# Altium PCB PCB.PcbDoc
Units mm, origin at the board's own origin, x right, y up, seen from the top; angles counter-clockwise.
Board outline 44.8 x 15 mm, 2 copper layers (Top Layer, Bottom Layer), stack 1.18 mm thick; 4 components, 14 nets, 48 pads, 18 vias.
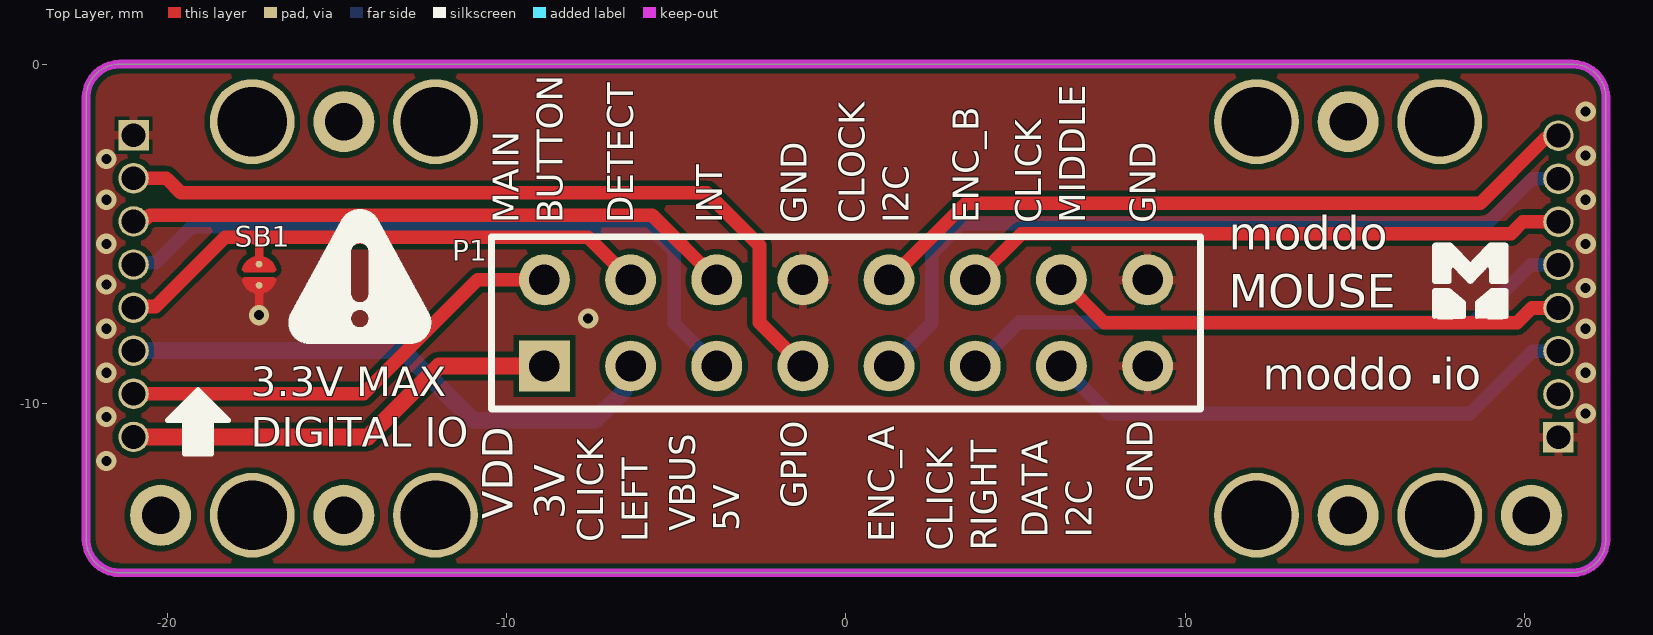
[diagram p0: Top Layer view]
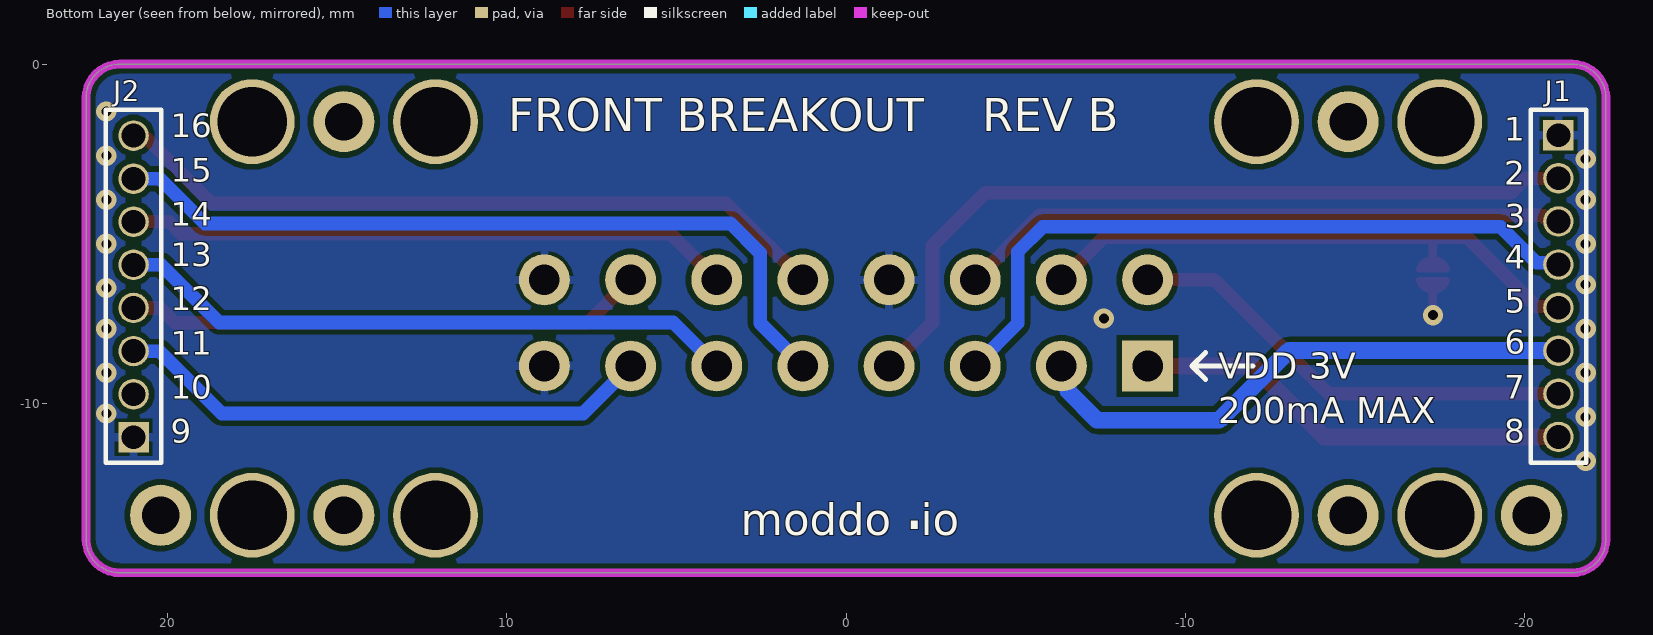
[diagram p1: Bottom Layer view, seen from below]

## Layer stack, top to bottom
Top Solder: solder mask 0.0102, Solder Resist, Dk 3.5
Top Layer: signal copper 0.0356
Dielectric 1: dielectric 1.1086, FR-4, Dk 4.8
Bottom Layer: signal copper 0.0356
Bottom Solder: solder mask 0.0102, Solder Resist, Dk 3.5

## Board outline
-21.4,-15 cw(c-21.4,-14) -22.4,-14 -22.4,-1 cw(c-21.4,-1) -21.4,0 21.4,0 cw(c21.4,-1) 22.4,-1 22.4,-14 cw(c21.4,-14) 21.4,-15

## Design rules (kind name [scope] priority, off if disabled: settings)
BoardOutlineClearance [All] p1: gap=0.2 ignorepadtopadclearanceinfootprint=FALSE
Clearance GND_bot [InNamedPolygon('GND_bot')] p1: gap=0.2 ignorepadtopadclearanceinfootprint=FALSE
Clearance GND_top [InNamedPolygon('GND_top')] p2: gap=0.1 ignorepadtopadclearanceinfootprint=FALSE
Clearance [All] p3: gap=0.16 ignorepadtopadclearanceinfootprint=FALSE
HoleSize [All] p1: absolutevalues=TRUE maxlimit=20 minlimit=0.025 maxpercent=80.000 minpercent=20.000
MinimumSolderMaskSliver [All] p1: minsoldermaskwidth=0.05
PolygonConnect [All] p1: thpad.connectstyle=Relief thpad.reliefconductorwidth=0.254 thpad.reliefentries=4 thpad.polygonreliefangle="90 Angle" thpad.airgapwidth=0.1 smdpad.connectstyle=Relief smdpad.reliefconductorwidth=0.254 smdpad.reliefentries=4 smdpad.polygonreliefangle="90 Angle" smdpad.airgapwidth=0.1 via.connectstyle=Direct via.reliefconductorwidth=0.254 via.reliefentries=4 via.polygonreliefangle="90 Angle" via.airgapwidth=0.254
RoutingVias [All] p1: holewidth=0.3 width=0.4 viastyle="Through Hole" minholewidth=0.3 minwidth=0.4 maxholewidth=2 maxwidth=10
SilkToSilkClearance [All] p1: silktosilkclearance=0.01
SilkToSolderMaskClearance [IsPad] p1: minsilkscreentomaskgap=0.001 clearancetoexposedcopper=TRUE
SolderMaskExpansion [All] p1: expansion=0.05 istentingtop=FALSE
SupplyNets "Schematic Supply Nets_1" [InNet('GND')] p1: voltage=0.000
SupplyNets "Schematic Supply Nets" [InNet('VDD_EXP')] p2: voltage=0.000
SupplyNets "Schematic Supply Nets_2" [InNet('VBUS')] p3: voltage=0.000
UnRoutedNet [All] p1: checkbadconnections=TRUE
Width [All] p1: maxlimit=2.54 minlimit=0.089 preferedwidth=0.254
25 further rules are at their usual default settings.

## Components (designator, comment, footprint, x,y, rotation, side; value= is the part's Value field where it differs from the comment)
J1 "1.27mm_8pins" 1.27mm_8pins_MaleHeader -21,-2.1 r270 bottom
J2 "1.27mm_8pins" 1.27mm_8pins_MaleHeader 21,-11 r90 bottom
P1 "Header 8X2" HEADER_2_54_F_2X8 -8.89,-8.9 r0 top
SB1 "Solderbridge" Solderbridge -17.3,-6.212 r90 top

## Footprints (in the part's own frame and the unit in brackets; to place one, negate y for a bottom-side part, rotate by r counter-clockwise, add the part's x,y. Pads: shape width x height; smd on the part's side, far side on the other; paste and mask are expansions set on the pad)
1.27mm_8pins_MaleHeader [mm]
  rect 0.9x0.9 hole 0.7 mask+0.05: 1(0,0)
  round 0.9 hole 0.7 mask+0.05: 2(1.27,0) 3(2.54,0) 4(3.81,0) 5(5.08,0) 6(6.35,0) 7(7.62,0) 8(8.89,0)
  silkscreen extent -0.75,-0.82 9.65,0.82, body extent -0.83,-0.9 9.73,0.9, height 4.55
HEADER_2_54_F_2X8 [mm]
  rect 1.5x1.5 hole 0.9: 1(0,0)
  round 1.5 hole 0.9: 2(0,2.54) 3(2.54,0) 4(2.54,2.54) 5(5.08,0) 6(5.08,2.54) 7(7.62,0) 8(7.62,2.54) 9(10.16,0) 10(10.16,2.54) 11(12.7,0) 12(12.7,2.54) 13(15.24,0) 14(15.24,2.54) 15(17.78,0) 16(17.78,2.54)
  silkscreen extent -1.56,-1.27 19.34,3.81, body extent -1.55,-1.23 19.27,3.77, height 8.55
Solderbridge [mm]
  round 0.2 smd paste-10: 1(-0.312,0) 2(0.312,0)
  Top Layer region: -0.077,-0.432 -0.152,-0.505 -0.271,-0.467 -0.335,-0.424 -0.409,-0.351 -0.462,-0.292 -0.521,-0.193 -0.549,-0.099 -0.544,0.122 -0.518,0.193 -0.434,0.33 -0.351,0.411 -0.259,0.469 -0.157,0.5 -0.107,0.483 -0.077,0.43
  Top Layer region: 0.077,0.432 0.152,0.505 0.271,0.467 0.335,0.424 0.409,0.351 0.462,0.292 0.521,0.193 0.549,0.099 0.544,-0.122 0.518,-0.193 0.434,-0.33 0.351,-0.411 0.259,-0.469 0.157,-0.5 0.107,-0.483 0.077,-0.43
  Top Layer lines w0.152: -0.153,0.431 ccw(c-0.042,0) -0.471,0.118 ; 0.153,0.431 cw(c0.042,0) 0.487,0 cw(c0.042,0) 0.312,-0.353 cw(c0.042,0) 0.153,-0.431 ; -1.188,0 -1.088,0 -1.059,0.028 -0.56,0.028 -0.471,0.118 ; -0.153,-0.431 cw(c-0.042,0) -0.471,-0.118 cw(c-0.042,0) -0.487,0 cw(c-0.042,0) -0.471,0.118

## Part data
P1: "Header, 8-Pin, Dual row", LatestRevisionDate=17-Jul-2002, LatestRevisionNote="Re-released for DXP Platform.", Publisher="Altium Limited"
SB1: library part SOLDERBRIDGE, Artikkelnr Noca=N.A., Artikkelnr Simpro=N.A., Footprint Doc=Solderbridge, LatestRevisionDate=2009-12-14, Part Number=Solderbridge, Pin Count=2, Published=2009-12-14, Publisher="Nordic Semiconductor"

## Free pads (board coordinates)
  round 1.8 hole 1.1: ""(-20.2,-13.3) ""(-14.8,-13.3) ""(-14.8,-1.7) ""(14.8,-13.3) ""(14.8,-1.7) ""(20.2,-13.3)
  round 2.5 hole 2.05: ""(-17.5,-13.3) ""(-17.5,-1.7) ""(-12.1,-13.3) ""(-12.1,-1.7) ""(12.1,-13.3) ""(12.1,-1.7) ""(17.5,-13.3) ""(17.5,-1.7)

## Via types
v1: diameter 0.6, hole 0.3, Top Layer to Bottom Layer, tented both sides, 18 vias

## Nets (pads, with @x,y where several pads share a name; then routed paths per layer and width w, separated by ;. In a path a pad name is that pad's centre, name@x,y a point inside that pad or via, vN(x,y) a via of type N, cw(c..) or ccw(c..) an arc to the next point about the centre after c; other vN are vias at no path point)
BUTTON: J1.7 P1.2 | length 13.5
  Top Layer w0.4: J1.7 -14.22,-9.72 -10.86,-6.36 P1.2
CLICK_LEFT: J1.6 P1.3 | length 16.5
  Bottom Layer w0.5: J1.6 -13.05,-8.45 -11,-10.5 -7.4,-10.5 -6.541,-9.641 -6.541,-9.091 P1.3
CLICK_MIDDLE: J2.4 P1.14 | length 15.4
  Top Layer w0.4: P1.14 7.613,-7.623 19.777,-7.623 20.21,-7.19 J2.4
CLICK_RIGHT: J2.5 P1.11 | length 18.4
  Bottom Layer w0.4: P1.11 5.093,-7.617 18.483,-7.617 20.18,-5.92 J2.5
ENC_A: J2.7 P1.9 | length 23.2
  Bottom Layer w0.4: P1.9 2.533,-7.637 2.533,-5.567 3.4,-4.7 18.9,-4.7 20.22,-3.38 J2.7
ENC_B: J2.6 P1.12 | length 17.9
  Top Layer w0.4: P1.12 5.17,-5 19.6,-5 19.95,-4.65 J2.6
FRONT_DETECT: J1.5 P1.4 SB1.2 | length 16.7
  Top Layer w0.25: -17.3,-5.725 -17.3,-5.2
  Top Layer w0.4: J1.5 -20.968,-7.148 -20.348,-7.148 -18.3,-5.1 -17.4,-5.1 ; -17.3,-5.2 -17.4,-5.1 ; P1.4 -7.61,-5.1 -17.4,-5.1
FRONT_GPIO: J1.2 P1.7 | length 23.4
  Top Layer w0.4: J1.2 -20.03,-3.37 -19.6,-3.8 -4.1,-3.8 -2.55,-5.35 -2.55,-7.62 P1.7
FRONT_INT: J1.3 P1.6 | length 18.1
  Top Layer w0.4: J1.3 -20.904,-4.544 -20.609,-4.544 -20.516,-4.451 -5.719,-4.451 P1.6
GND: J1.1 J2.1 P1.8 P1.15 P1.16 SB1.1 | length 0.9
  Top Layer w0.25: v1(-17.3,-7.4) -17.3,-7.3 -17.3,-6.699 SB1.1
  other v1: -21.8,-11.7 -21.8,-10.4 21.8,-10.3 -21.8,-9.1 21.8,-9.1 -21.8,-7.8 21.8,-7.8 -7.6,-7.5 21.8,-6.6 -21.8,-6.5 -21.8,-5.3 21.8,-5.3 -21.8,-4 21.8,-4 -21.8,-2.8 21.8,-2.7 21.8,-1.4
I2C_FRONT_CLK: J2.8 P1.10 | length 21.5
  Top Layer w0.4: P1.10 3.53,-4.1 18.7,-4.1 20.594,-2.206 20.904,-2.206 J2.8
I2C_FRONT_DATA: J2.3 P1.13 | length 16
  Bottom Layer w0.4: P1.13 7.75,-10.3 18.4,-10.3 20.24,-8.46 J2.3
VBUS: J1.4 P1.5 | length 20.6
  Bottom Layer w0.4: J1.4 -20.953,-5.863 -20.363,-5.863 -19.3,-4.8 -5.8,-4.8 -5.066,-5.534 -5.066,-7.644 P1.5
VDD_EXP: J1.8 P1.1 | length 13
  Top Layer w0.5: J1.8 -14.09,-10.99 -12,-8.9 P1.1
pads on no net: J2.2

## Polygon pours and split planes (outlines as drawn)
GND on Top Layer "GND_L01_P000" (solid, pour order 0): -21.4,-15 cw(c-21.4,-14) -22.4,-14 -22.4,-1 cw(c-21.4,-1) -21.4,0 21.4,0 cw(c21.4,-1) 22.4,-1 22.4,-14 cw(c21.4,-14) 21.4,-15
GND on Bottom Layer "GND_L02_P002" (solid, pour order 2): -21.4,-15 cw(c-21.4,-14) -22.4,-14 -22.4,-1 cw(c-21.4,-1) -21.4,0 21.4,0 cw(c21.4,-1) 22.4,-1 22.4,-14 cw(c21.4,-14) 21.4,-15

## Keep-outs
Keep-Out Layer:
  the board outline again, w0.254

## Silkscreen, mask and mechanical layers (free items; w line width, h text height)
Top Overlay:
  drawing of 31 lines, arcs and shapes, not listed
  text "MAIN / BUTTON" at -8.1,-4.7 h1.3 r90
  text "DETECT" at -6.014,-4.7 h1.3 r90
  text "INT" at -3.4,-4.7 h1.3 r90
  text "GND" at -0.914,-4.7 h1.3 r90
  text "CLOCK / I2C" at 2.1,-4.7 h1.3 r90
  text "ENC_B" at 4.166,-4.7 h1.3 r90
  text "CLICK / MIDDLE" at 7.3,-4.7 h1.3 r90
  text "GND" at 9.386,-4.7 h1.3 r90
  text "moddo / MOUSE" at 11.282,-7.504 h1.7
  text "moddo" at 12.289,-9.914 h1.6
  text "." at 17.089,-9.914 h2.5
  text "io" at 17.589,-9.914 h1.6
  text "3.3V MAX / DIGITAL IO" at -17.55,-11.58 h1.5
  text "GND" at 9.286,-12.9 h1.3 r90
  text "GPIO" at -0.914,-13.1 h1.3 r90
  text "VDD / 3V" at -8,-13.413 h1.52 r90
  text "VBUS / 5V" at -2.9,-13.771 h1.3 r90
  text "DATA / I2C" at 7.5,-13.964 h1.3 r90
  text "CLICK / LEFT" at -5.6,-14.093 h1.3 r90
  text "ENC_A" at 1.666,-14.1 h1.3 r90
  text "CLICK / RIGHT" at 4.7,-14.342 h1.3 r90
Bottom Overlay:
  lines w0.15: -12,-8.9 -10.2,-8.9 ; -10.6,-9.3 -10.2,-8.9 ; -10.6,-8.5 -10.2,-8.9
  text "FRONT BREAKOUT    REV B" at 9.95,-2.3 h1.65
  text "16" at 19.9,-2.4 h1.2
  text "1" at -19.4,-2.5 h1.2
  text "15" at 19.9,-3.7 h1.2
  text "2" at -19.4,-3.8 h1.2
  text "14" at 19.9,-5 h1.2
  text "3" at -19.421,-5.068 h1.2
  text "13" at 19.9,-6.2 h1.2
  text "4" at -19.421,-6.268 h1.2
  text "12" at 19.9,-7.5 h1.2
  text "5" at -19.421,-7.568 h1.2
  text "6" at -19.421,-8.768 h1.2
  text "11" at 19.9,-8.8 h1.2
  text "7" at -19.4,-10.1 h1.2
  text "10" at 19.9,-10.1 h1.2
  text "VDD 3V / 200mA MAX" at -10.975,-10.834 h1.3
  text "8" at -19.4,-11.4 h1.2
  text "9" at 19.9,-11.4 h1.2
  text "io" at -2.2,-14.2 h1.6
  text "." at -1.7,-14.2 h2.5
  text "moddo" at 3.1,-14.2 h1.6